# Altium PCB Robonaut.PcbDoc
Units mil, origin at the board's own origin, x right, y up, seen from the top; angles counter-clockwise.
Board outline 4928.03 x 4243.03 mil, 2 copper layers (Top Layer, Bottom Layer); 71 components, 81 nets, 356 pads, 9 vias.
Unrouted connection lines stored in the file: 1.
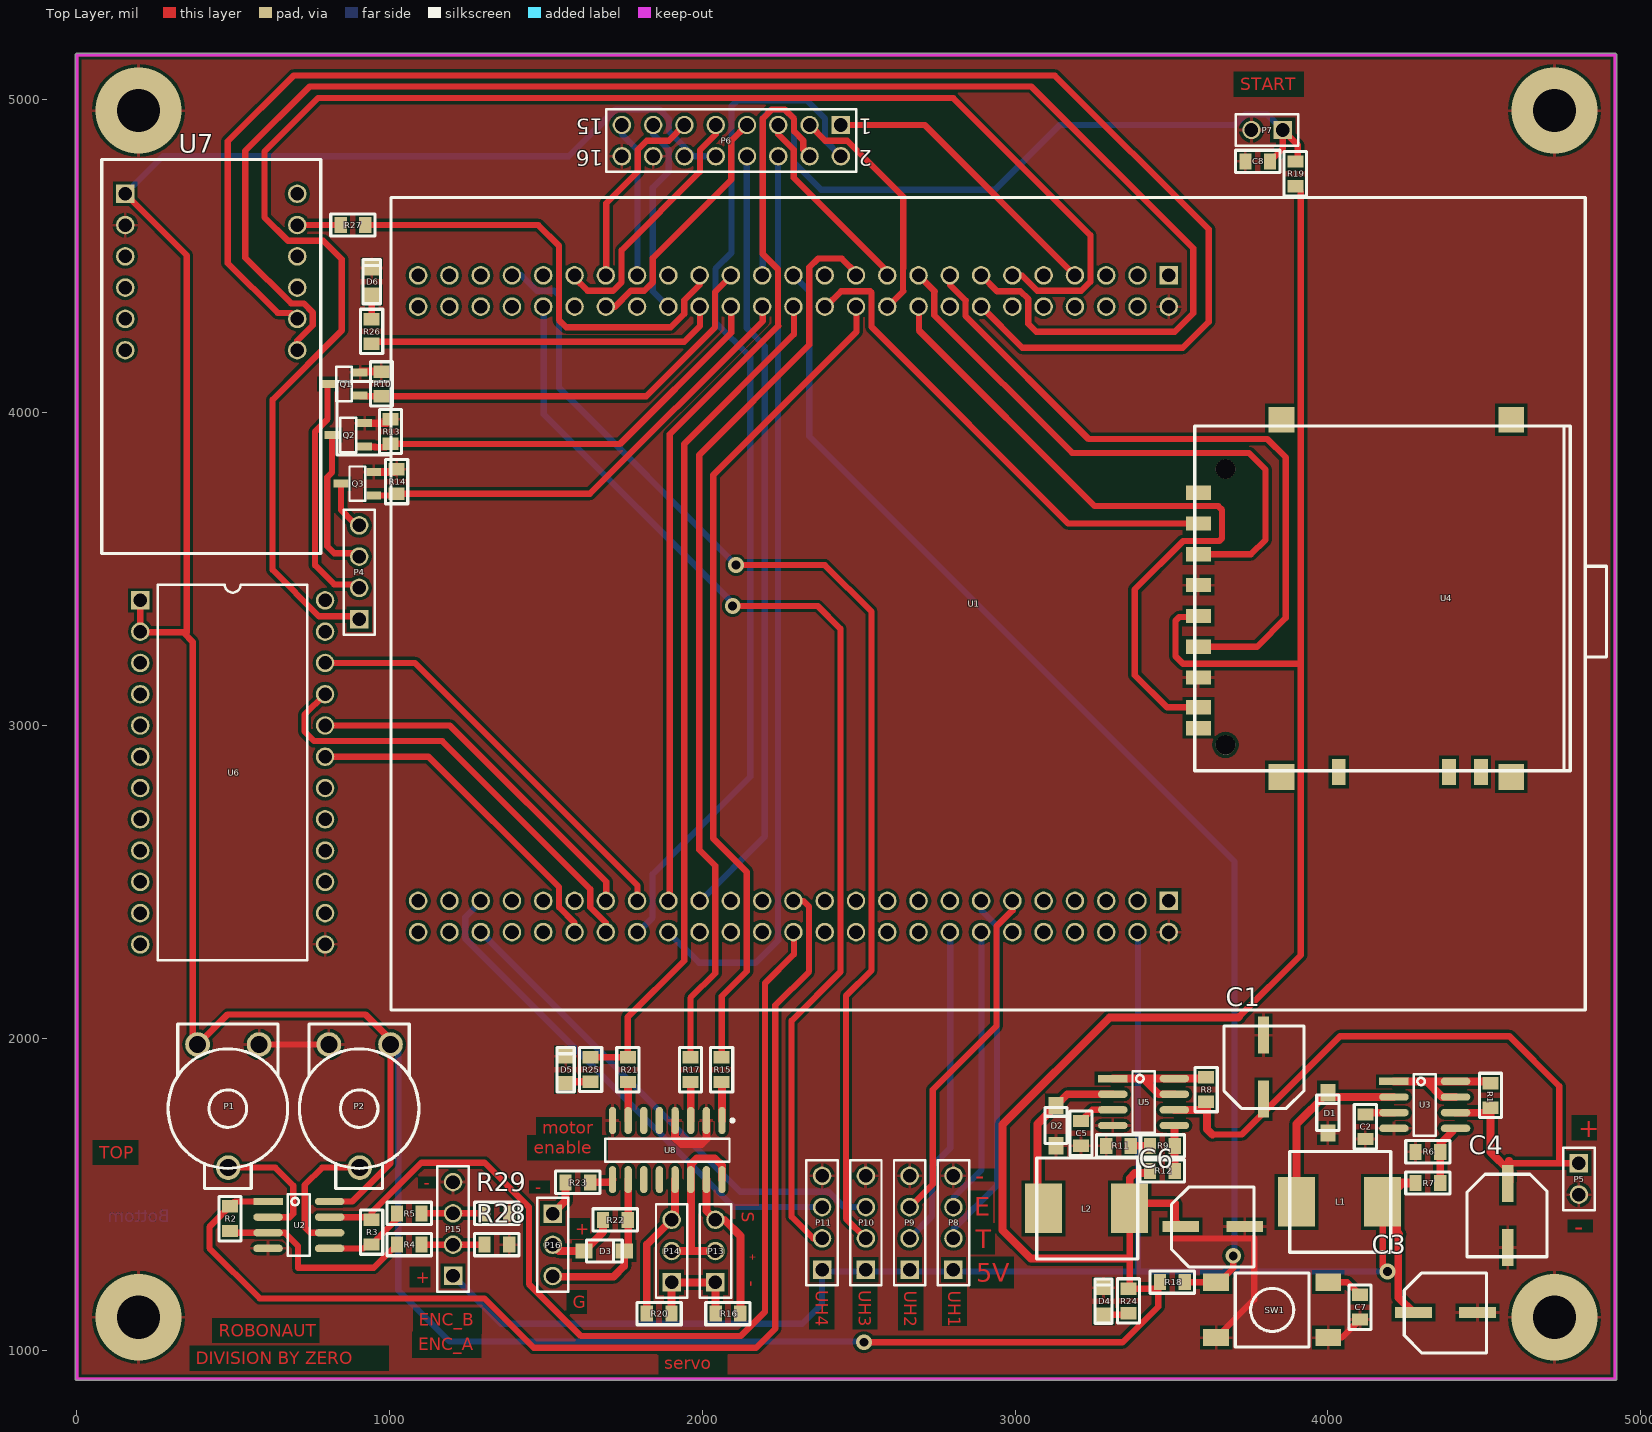
[diagram p0: Top Layer view]
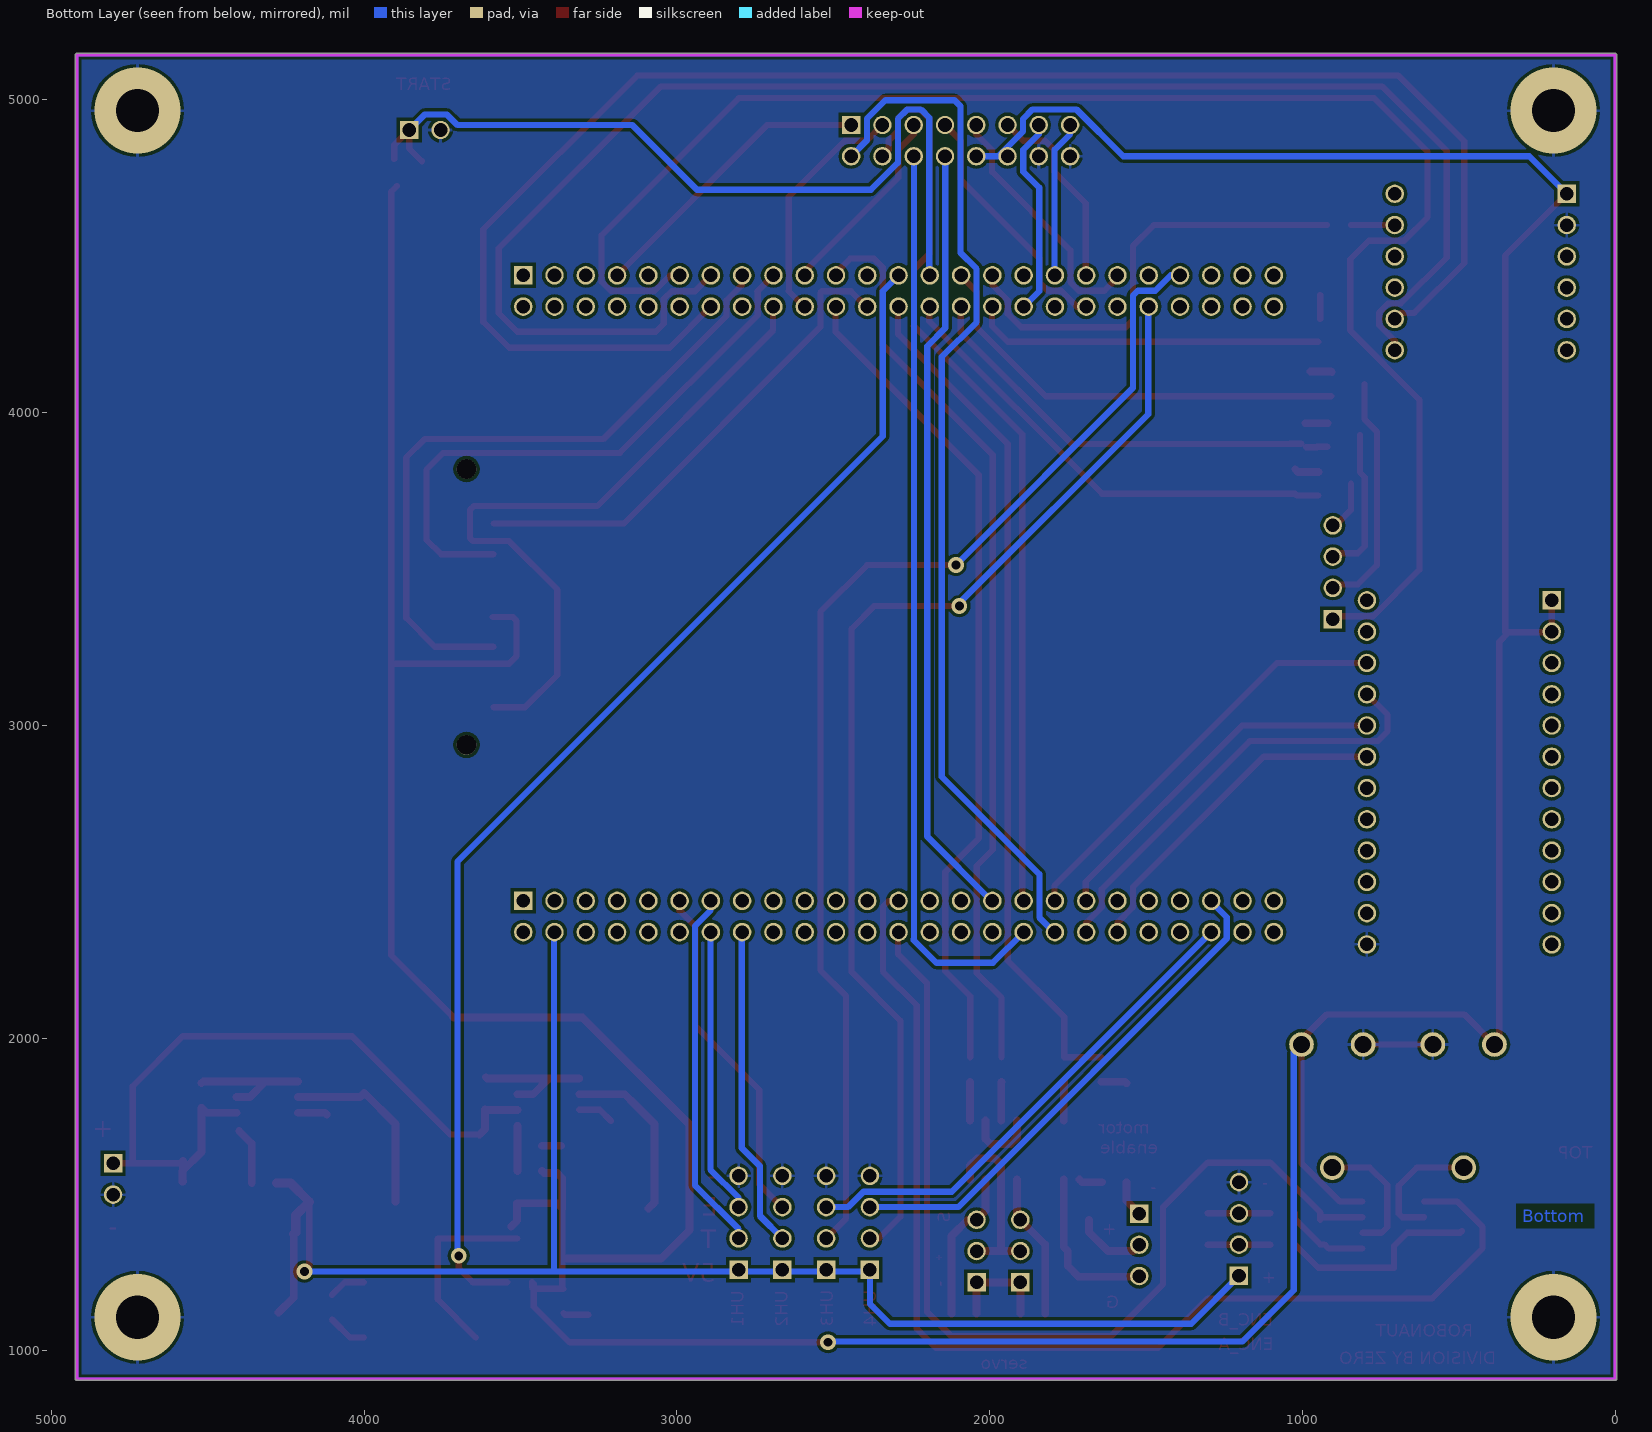
[diagram p1: Bottom Layer view, seen from below]
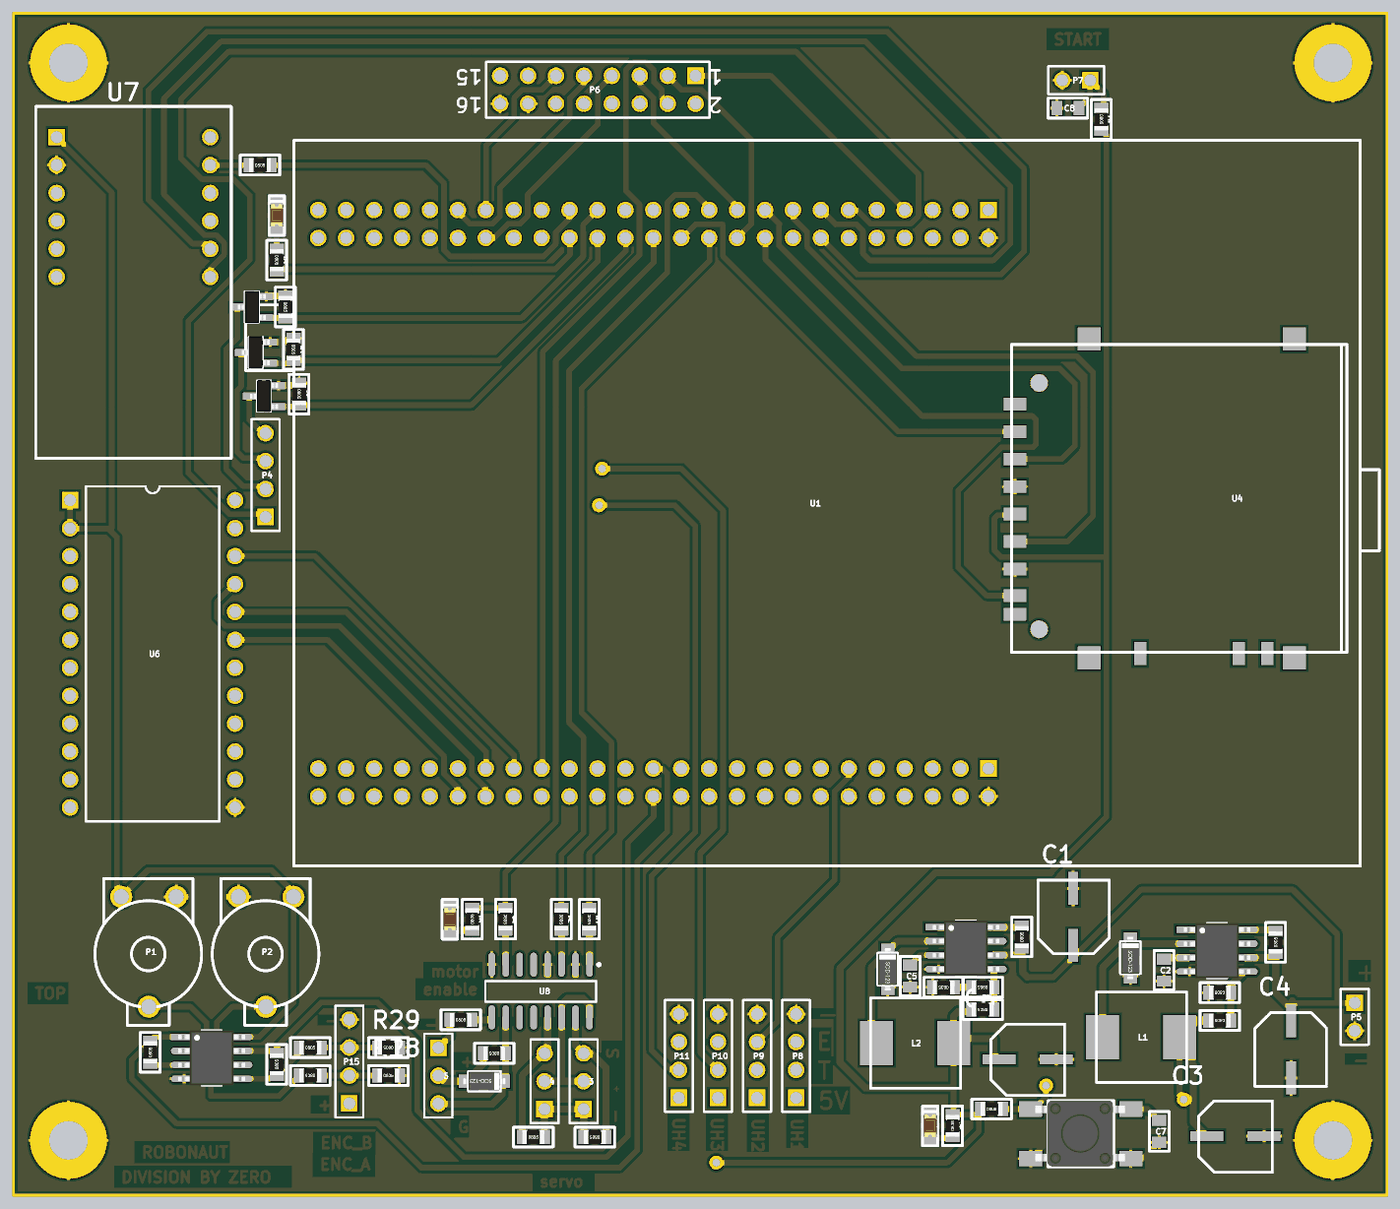
[diagram p2: 3D render of the assembled board from above, using the file's embedded part models]

## Layer stack, top to bottom
Top Layer: signal copper 1.4
Dielectric: dielectric 12.6, FR-4, Dk 4.8
Bottom Layer: signal copper 1.4

## Board outline
-5.01,911 ccw(c0,911) 0,905.99 4918,905.99 ccw(c4918,911) 4923.01,911 4923.01,5144 ccw(c4918,5144) 4918,5149.02 0,5149.02 ccw(c0,5144) -5.01,5144

## Design rules (kind name [scope] priority, off if disabled: settings)
Clearance [All] p1: gap=10
PolygonConnect [All] p1: connectstyle=Relief reliefconductorwidth=10 reliefentries=4 polygonreliefangle="90 Angle"
RoutingVias [All] p1: holewidth=28 width=50 viastyle="Through Hole" minholewidth=28 minwidth=50 maxholewidth=28 maxwidth=50
SilkscreenOverComponentPads [All] p1: minsilkscreentomaskgap=10
SolderMaskExpansion [All] p1: expansion=4
Width [All] p1: maxlimit=30 minlimit=20 preferedwidth=25
27 further rules are at their usual default settings.

## Components (designator, comment, footprint, x,y, rotation, side; value= is the part's Value field where it differs from the comment)
C1 "100uF" FP_CAP_ELKO_6,3X6,3 3794,1823 r90 top
C2 "470pF" FP_0805_CAP_085 4119.47,1717 r90 top
C3 "100uF" FP_CAP_ELKO_6,3X6,3 4291,1123 r0 top
C4 "100uF" FP_CAP_ELKO_6,3X6,3 4575,1518 r270 top
C5 "470pF" FP_0805_CAP_085 3210.47,1696 r90 top
C6 "100uF" FP_CAP_ELKO_6,3X6,3 3547,1398 r0 top
C7 "10nF" FP_0805_CAP_085 4102.47,1140 r270 top
C8 "10nF" FP_0805_CAP_085 3775.47,4804 r0 top
D1 "1N5819" FP_SOD-123 3999.47,1697 r90 top
D2 "1N5819" FP_SOD-123 3130.47,1656 r90 top
D3 "ZENER" FP_SOD-123 1621.47,1319.49 r0 top
D4 "LED" FP_0805_LED_RED 3282.47,1120 r90 top
D5 "LED" FP_0805_LED_RED 1562.47,1860 r90 top
D6 "LED" FP_0805_LED_RED 942.47,4380 r90 top
L1 "220uH" FP_IND_MURATA3131 3899.47,1477 r270 top
L2 "220uH" FP_IND_MURATA3131 3090.47,1456 r270 top
P1 "10k" "Res Trimmer TH" 582.47,1980 r180 top
P2 "10k" "Res Trimmer TH" 1002.47,1980 r180 top
P4 "Header 4" HDR1X4 902.47,3340 r90 top
P5 "Header 2" HDR1X2 4802.47,1600 r270 top
P6 "Header 8X2" HDR2X8 2442.47,4920 r180 top
P7 "Header 2" HDR1X2 3855.47,4904 r180 top
P8 "Header 4" HDR1X4 2802.47,1260 r90 top
P9 "Header 4" HDR1X4 2662.47,1260 r90 top
P10 "Header 4" HDR1X4 2522.47,1260 r90 top
P11 "Header 4" HDR1X4 2382.47,1260 r90 top
P13 "Header 3" HDR1X3 2041.47,1219.49 r90 top
P14 "Header 3" HDR1X3 1901.47,1219.49 r90 top
P15 "Header 4" HDR1X4 1202.47,1240 r90 top
P16 "Header 3" HDR1X3 1521.47,1439.49 r270 top
Q1 "MMBF170" BBMF170 853.47,4092 r0 top
Q2 "MMBF170" BBMF170 867.47,3929 r0 top
Q3 "MMBF170" BBMF170 896.47,3773 r0 top
R1 "0.33R" FP_0805_RES 4519.47,1817 r90 top
R2 "1M" FP_0805_RES 489.47,1423 r90 top
R3 "1M" FP_0805_RES 942.47,1380 r90 top
R4 "20k" FP_0805_RES 1062.47,1340 r180 top
R5 "20k" FP_0805_RES 1062.47,1440 r0 top
R6 "1K" FP_0805_RES 4319.47,1637 r180 top
R7 "3K" FP_0805_RES 4319.47,1537 r180 top
R8 "0.33R" FP_0805_RES 3610.47,1836 r90 top
R9 "2k4" FP_0805_RES 3470.47,1656 r180 top
R10 "10k" FP_0805_RES 973.47,4092 r270 top
R11 "47R" FP_0805_RES 3330.47,1656 r180 top
R12 "4k02" FP_0805_RES 3470.47,1576 r180 top
R13 "10k" FP_0805_RES 1002.47,3940 r270 top
R14 "10k" FP_0805_RES 1022.47,3780 r270 top
R15 "1k" FP_0805_RES 2061.47,1899.49 r270 top
R16 "10k" FP_0805_RES 2081.47,1119.49 r180 top
R17 "1k" FP_0805_RES 1961.47,1899.49 r270 top
R18 "10k" FP_0805_RES 3502.47,1220 r0 top
R19 "10k" FP_0805_RES 3895.47,4764 r270 top
R20 "10k" FP_0805_RES 1861.47,1119.49 r0 top
R21 "1k" FP_0805_RES 1761.47,1899.49 r270 top
R22 "10k" FP_0805_RES 1721.47,1419.49 r180 top
R23 "1k" FP_0805_RES 1601.47,1539.49 r0 top
R24 "1k" FP_0805_RES 3362.47,1160 r90 top
R25 "1k" FP_0805_RES 1642.47,1900 r90 top
R26 "1k" FP_0805_RES 942.47,4260 r270 top
R27 "10k" FP_0805_RES 882.47,4600 r0 top
R28 "xR" FP_0805_RES 1342.47,1340 r0 top
R29 "xR" FP_0805_RES 1342.47,1440 r180 top
SW1 "SW1" FP_TACTBTN 3642.47,1220 r90 top
U1 "STM32_F4_KIT" FP_STM32F4DISC 3491,4439.3 r270 top
U2 "LM358" FP_SO8_MS012AA 709.47,1403 r0 top
U3 "MC34063A" FP_SO8_MS012AA 4309.47,1787 r0 top
U4 "SecureDigital memory card" FP_CONN_SD 3672.47,2938 r90 top
U5 "MC34063A" FP_SO8_MS012AA 3410.47,1796 r0 top
U6 "STEVAL-MKI107V2" "STEVAL-MKI107V2 DIL24 Adapter" 202.47,3400 r0 top
U7 "STM BT MODULKÁRTYA" "STM BT MODUL" 322.47,4020 r270 top
U8 "TLP281-4" TLP281-4 1861.47,1639.49 r0 top

## Footprints (in the part's own frame and the unit in brackets; to place one, negate y for a bottom-side part, rotate by r counter-clockwise, add the part's x,y. Pads: shape width x height; smd on the part's side, far side on the other; paste and mask are expansions set on the pad)
BBMF170 [mm] "SOT23-3 tok"
  rect 1.2x0.65 smd: D(-1.327,0) G(1.327,-0.95) S(1.327,0.95)
  silkscreen extent -0.64,-1.4 0.64,1.4, body extent -1.27,-1.46 1.27,1.46, height 0.97
FP_0805_CAP_085 [mm] "0805 kapacitás YAGEO 0.85mm magas"
  rect 1x1.3 smd: 1(-1,0) 2(1,0)
  silkscreen extent -1.8,-0.9 1.8,0.9, body extent -1,-0.64 1.03,0.64, height 0.85
FP_0805_LED_RED [mm] "0805 méretû piros LED"
  rect 1.2x1.3 smd: A(-0.1,0) K(2.1,0)
  silkscreen extent -0.8,-0.7 2.8,0.7, body extent 0.01,-0.63 2.03,0.62, height 1.1
FP_0805_RES [mm] "0805 ellenállás"
  rect 1x1.3 smd: 1(-1,0) 2(1,0)
  silkscreen extent -1.8,-0.9 1.8,0.9, body extent -1,-0.62 1,0.63, height 0.62
FP_CAP_ELKO_6,3X6,3 [mm] "680 uF/SMD-NIC 47 uF/SMD-NIC ELKO 16 V 105°C 20 % KIS IMPEDANCIÁS SMD O6,3x6,3mm"
  rect 3x0.9 smd: N(4.75,0) P(-0.45,0)
  silkscreen extent -1.2,-3.3 5.5,3.2, body extent -1.25,-3.3 5.35,3.3, height 6.3
FP_CONN_SD [mm]
  rect 2.1x2.1 smd: 0(-2.6,-4.55) 0(-2.6,-23.2) 0(26.4,-23.2) 0(26.4,-4.55)
  round 1.6 hole 1.6: 0(0,0) 0(22.4,0)
  rect 1.15x2.05 smd: 1(17.975,2.2) 2(15.475,2.2) 3(12.975,2.2) 4(10.475,2.2) 5(7.975,2.2) 6(5.475,2.2) 7(3.05,2.2) 8(1.35,2.2) 9(20.475,2.2)
  rect 2.1x1.1 smd: 10(-2.2,-9.2) 11(-2.2,-18.15) 12(-2.2,-20.75)
  silkscreen extent -2.1,-28 25.9,2.5, body extent -2.1,-39 25.9,2.5, height 2.9
FP_IND_MURATA3131 [mm] "Murata Chip Inductor LQH88P Series (3131 Size)"
  rect 4x3 smd: 1(0,0) 2(0,7)
  silkscreen extent -4.1,-0.55 4.1,7.65, body extent -4,-0.55 4,7.65, height 3.8
FP_SO8_MS012AA [mm] "SO8 JEDEC MS-012AA, Analog Devices R-8, SO8-SOT96-1, NS M08A"
  rect 2.4x0.6 smd: 1(-2.5,1.905)
  oval 2.4x0.6 smd: 2(-2.5,0.635) 3(-2.5,-0.635) 4(-2.5,-1.905) 5(2.5,-1.905) 6(2.5,-0.635) 7(2.5,0.635) 8(2.5,1.905)
  silkscreen extent -0.9,-2.5 0.9,2.5, body extent -3.03,-2.5 3.03,2.5, height 1.9
FP_SOD-123 [mm]
  rect 1.41x1.22 smd: 1(3.27,0) 2(0,0)
  silkscreen extent 0.2,-0.9 3.1,0.9, body extent -0.3,-0.85 3.55,0.85, height 1.47
FP_STM32F4DISC [mm] "STM32 F4 Discovery evaluation board"
  rect 1.5x1.5 hole 1.1: 1(0,0) 51(50.8,0)
  round 1.5 hole 1.1: 2(2.54,0) 3(0,-2.54) 4(2.54,-2.54) 5(0,-5.08) 6(2.54,-5.08) 7(0,-7.62) 8(2.54,-7.62) 9(0,-10.16) 10(2.54,-10.16) 11(0,-12.7) 12(2.54,-12.7) 13(0,-15.24) 14(2.54,-15.24) 15(0,-17.78) 16(2.54,-17.78) 17(0,-20.32) 18(2.54,-20.32) 19(0,-22.86) 20(2.54,-22.86) 21(0,-25.4) 22(2.54,-25.4) 23(0,-27.94) 24(2.54,-27.94) 25(0,-30.48) 26(2.54,-30.48) 27(0,-33.02) 28(2.54,-33.02) 29(0,-35.56) 30(2.54,-35.56) 31(0,-38.1) 32(2.54,-38.1) 33(0,-40.64) 34(2.54,-40.64) 35(0,-43.18) 36(2.54,-43.18) 37(0,-45.72) 38(2.54,-45.72) 39(0,-48.26) 40(2.54,-48.26) 41(0,-50.8) 42(2.54,-50.8) 43(0,-53.34) 44(2.54,-53.34) 45(0,-55.88) 46(2.54,-55.88) 47(0,-58.42) 48(2.54,-58.42) 49(0,-60.96) 50(2.54,-60.96) 52(53.34,0) 53(50.8,-2.54) 54(53.34,-2.54) 55(50.8,-5.08) 56(53.34,-5.08) 57(50.8,-7.62) 58(53.34,-7.62) 59(50.8,-10.16) 60(53.34,-10.16) 61(50.8,-12.7) 62(53.34,-12.7) 63(50.8,-15.24) 64(53.34,-15.24) 65(50.8,-17.78) 66(53.34,-17.78) 67(50.8,-20.32) 68(53.34,-20.32) 69(50.8,-22.86) 70(53.34,-22.86) 71(50.8,-25.4) 72(53.34,-25.4) 73(50.8,-27.94) 74(53.34,-27.94) 75(50.8,-30.48) 76(53.34,-30.48) 77(50.8,-33.02) 78(53.34,-33.02) 79(50.8,-35.56) 80(53.34,-35.56) 81(50.8,-38.1) 82(53.34,-38.1) 83(50.8,-40.64) 84(53.34,-40.64) 85(50.8,-43.18) 86(53.34,-43.18) 87(50.8,-45.72) 88(53.34,-45.72) 89(50.8,-48.26) 90(53.34,-48.26) 91(50.8,-50.8) 92(53.34,-50.8) 93(50.8,-53.34) 94(53.34,-53.34) 95(50.8,-55.88) 96(53.34,-55.88) 97(50.8,-58.42) 98(53.34,-58.42) 99(50.8,-60.96) 100(53.34,-60.96)
  silkscreen extent -6.33,-67.56 59.67,35.56, body extent -6.33,-67.69 59.67,35.56, height 24.6
FP_TACTBTN [mm] "TE CONNECTIVITY / ALCOSWITCH - FSM2JSMA"
  rect 1.4x2.1 smd: 1(0,0) 2(0,-9.1) 3(-4.5,0) 4(-4.5,-9.1)
  silkscreen extent -5.25,-7.55 0.75,-1.55, body extent -5.23,-8.57 0.77,-0.42, height 5
HDR1X2 [mm] "Connector; Header; 2 Position"
  rect 1.5x1.5 hole 1.1: 1(0,0)
  round 1.5 hole 1.1: 2(2.54,0)
  silkscreen extent -1.27,-1.27 3.81,1.27
HDR1X3 [mm] "Connector; Header; 3 Position"
  rect 1.5x1.5 hole 1.1: 1(0,0)
  round 1.5 hole 1.1: 2(2.54,0) 3(5.08,0)
  silkscreen extent -1.27,-1.27 6.35,1.27
HDR1X4 [mm] "Connector; Header; 4 Position"
  rect 1.5x1.5 hole 1.1: 1(0,0)
  round 1.5 hole 1.1: 2(2.54,0) 3(5.08,0) 4(7.62,0)
  silkscreen extent -1.27,-1.27 8.89,1.27
HDR2X8 [mm] "Connector; Header; 8x2 Position"
  rect 1.5x1.5 hole 1.1: 1(0,0)
  round 1.5 hole 1.1: 2(0,2.54) 3(2.54,0) 4(2.54,2.54) 5(5.08,0) 6(5.08,2.54) 7(7.62,0) 8(7.62,2.54) 9(10.16,0) 10(10.16,2.54) 11(12.7,0) 12(12.7,2.54) 13(15.24,0) 14(15.24,2.54) 15(17.78,0) 16(17.78,2.54)
  silkscreen extent -1.27,-1.27 19.05,3.81
"Res Trimmer TH" [mm]
  round 2 hole 1.4: 1(0,0) 2(2.5,10) 3(5,0)
  silkscreen extent -2.31,-1.65 7.39,11.68
"STEVAL-MKI107V2 DIL24 Adapter" [mm]
  rect 1.5x1.5 hole 1.1: 1(0,0)
  round 1.5 hole 1.1: 2(0,-2.54) 3(0,-5.08) 4(0,-7.62) 5(0,-10.16) 6(0,-12.7) 7(0,-15.24) 8(0,-17.78) 9(0,-20.32) 10(0,-22.86) 11(0,-25.4) 12(0,-27.94) 13(15.01,-27.94) 14(15.01,-25.4) 15(15.01,-22.86) 16(15.01,-20.32) 17(15.01,-17.78) 18(15.01,-15.24) 19(15.01,-12.7) 20(15.01,-10.16) 21(15.01,-7.62) 22(15.01,-5.08) 23(15.01,-2.54) 24(15.01,0)
  silkscreen extent 1.43,-29.21 13.58,1.27
"STM BT MODUL" [mm]
  rect 1.5x1.5 hole 1.1: 1(-17.272,-4.268)
  round 1.5 hole 1.1: 2(-14.732,-4.268) 3(-12.192,-4.268) 4(-9.652,-4.268) 5(-7.112,-4.268) 6(-4.572,-4.268) 7(-4.572,9.702) 8(-7.112,9.702) 9(-9.652,9.702) 10(-12.192,9.702) 11(-14.732,9.702) 12(-17.272,9.702)
  silkscreen extent -20.07,-6.17 11.94,11.61, body extent -18.54,-5.54 -3.3,10.97, height 2.54
TLP281-4 [mm]
  oval 0.6x2.2 smd: 1(5.105,2.476) 2(3.835,2.476) 3(2.565,2.476) 4(1.295,2.476) 5(0.025,2.476) 6(-1.245,2.476) 7(-2.515,2.476) 8(-3.785,2.476) 9(-3.785,-2.324) 10(-2.515,-2.324) 11(-1.245,-2.324) 12(0.025,-2.324) 13(1.295,-2.324) 14(2.565,-2.324) 15(3.835,-2.324) 16(5.105,-2.324)
  silkscreen extent -4.37,-0.89 6.08,2.6

## Part data
C1 C3 C4 C6: library part CAP_ELECT, "Polarized Capacitor"
C2 C5 C7 C8: library part CAP, "Capacitor"
D1 D2: library part DIODE
D3: "Zener Diode"
D4 D5 D6: "Typical RED GaAs LED"
L1 L2: library part IND, "Inductor"
P1 P2: library part POTI
P4 P8 P9 P10 P11 P15: "Header, 4-Pin"
P5 P7: "Header, 2-Pin"
P6: "Header, 8-Pin, Dual row"
P13 P14 P16: "Header, 3-Pin"
Q1 Q2 Q3: "N fet  60V 500mA"
R1 R2 R3 R4 R5 R6 R7 R8 R9 R10 R11 R12 R13 R14 R15 R16 R17 R18 R19 R20 R21 R22 R23 R24 R25 R26 R27 R28 R29: library part RES, "Resistor"
U1: library part STM32F4DISCOVERY, "STM32 F4 Discovery Evaluation Kit"
U2: "Low power dual operational amplifiers"
U4: library part "SD card"
U6: "Three-axis digital output gyroscope"
U7: "bluetooth modulkártya"
U8: "Optocsatoló 4X"

## Via types
v1: diameter 50, hole 28, Top Layer to Bottom Layer, 5 vias
v2: diameter 275.59, hole 137.8, Top Layer to Bottom Layer, 4 vias

## Nets (pads, with @x,y where several pads share a name; then routed paths per layer and width w, separated by ;. In a path a pad name is that pad's centre, name@x,y a point inside that pad or via, vN(x,y) a via of type N, cw(c..) or ccw(c..) an arc to the next point about the centre after c; other vN are vias at no path point)
3V3: C6.P L2.2 P1.3 P2.1 P6.10 P6.12 R12.2 R18.1 R19.2 R24.2 U2.8 U4.4 U6.1 U6.2 U7.1 | length 15781.4
  Top Layer w20: U7.1 351.47,4502.97 351.47,3298 204.47,3298 U6.2 U6.1 ; 339.47,3298 370.47,3267 370.47,1995.15 P1.3 481.47,2075.85 922.62,2075.85 1002.47,1996 P2.1 1002.47,1600.47 880,1478 U2.8 ; v1(2516.47,1028) 3343.4,1028 3457,1141.6 3457,1213.9 R18.1 3463.1,1203.1 3459.37,1199.37 R24.2 3366.06,1202.96 L2.2 ; U4.4@3589.43,3346.83 3524.3,3346.83 3512.47,3335 3512.47,3221 3536.47,3197 3901.7,3197 ; 3715.55,2068.55 3912.94,2265.94 3912.94,3224 ; R19.2 3912.94,4707.16 3912.94,3224 ; 3912.94,3207.47 3912.94,3224
  Top Layer w25: 3360.06,1296 3049.47,1296 2959.47,1386 2959.47,1724 3301.47,2066 3713,2066 3715.55,2068.55 ; R12.2 3424.1,1569 3382.47,1569 3366.06,1552.59 L2.2 3382.17,1472.1 3510.47,1472.1 3510.47,1416.81 C6.P
  Bottom Layer w20: U7.1 274.44,4820 1572.43,4820 1721.96,4969.53 1862.99,4969.53 1892.94,4939.57 1892.94,4899.48 1972.43,4820 P6.12 P6.10 ; P2.1 1027.47,1955 1027.47,1194 1191.47,1030 2514.47,1030 v1(2516.47,1028)
5V: C3.P L1.2 P8.1 P9.1 P10.1 P11.1 P15.1 R7.2 U1.54 | length 5026.3
  Top Layer w20: L1.2 4175.06,1269.41 v1(4190.47,1254)
  Top Layer w25: 4225,1373 4225,1171.28 C3.P
  Top Layer w30: 4225,1373 4218.96,1379.04 4218.96,1433.1 L1.2 4235.06,1537 R7.2
  Bottom Layer w20: P15.1 1355.47,1087 2318.47,1087 2382.47,1151 P11.1 2388.47,1254 v1(4190.47,1254) ; 3392.47,1255 U1.54@3392.47,2338
AD1: P6.1 U1.7 | length 949.7
  Top Layer w20: P6.1 2710.47,4920 U1.7@3192.47,4438
AD2: P6.3 U1.20 | length 768.1
  Top Layer w20: P6.3 2392.94,4869.53 2462.99,4869.53 2642,4690.52 2642,4460.87 2641.47,4460.34 2641.47,4389 2642,4388.47 2592.47,4338.94 U1.20@2592.47,4338
AD3: P6.5 U1.19 | length 627
  Top Layer w20: P6.5 2242.47,4890.04 2292,4840.52 2292,4750.94 2592.47,4450.47 U1.19@2592.47,4438
"AD4 IR": P4.1 U1.11 | length 5262.2
  Top Layer w20: P4.1 892.94,3349.53 773.85,3349.53 625.47,3497.9 625.47,4042 846.47,4263 846.47,4491 787.94,4549.53 674.94,4549.53 599.47,4625 599.47,4835 770.47,5006 2802.47,5006 3240.53,4567.94 3240.53,4418.78 3211.51,4389.77 3070.49,4389.77 3041.47,4418.78 3041.47,4418.96 3022.43,4438 U1.11@2992.47,4438
AKKU+: D3.2 P16.2 R22.2 | length 233.4
  Top Layer w25: P16.2 1541.47,1319.49 D3.2 1682.1,1380.12 R22.2
AKKU-: P16.1 R23.1 | length 116.8
  Top Layer w25: P16.1 1562.1,1480.12 R23.1
BT_RES: R27.2 U1.31 | length 1455.4
  Top Layer w20: R27.2 1475.47,4600 1541.3,4534.17 1541.3,4296.17 1564.47,4273 1898.47,4273 1941.47,4316 1941.47,4359.81 1992.47,4410.81 U1.31@1992.47,4438
BUTTON: R18.2 SW1.1 U1.25 | length 3942.8
  Top Layer w20: R18.2 SW1.1 3653,1220 3697.47,1264.47 v1(3697.47,1304)
  Bottom Layer w20: U1.25 2341.47,4388.83 2341.47,3924.53 3701.47,2564.53 3701.47,1300 v1(3697.47,1304)
ECHO1: P8.3 U1.64 | length 915.3
  Bottom Layer w20: P8.3 2802.47,1489.96 2892.47,1579.96 U1.64@2892.47,2338
ECHO2: P9.3 U1.61 | length 1086.4
  Top Layer w20: P9.3 2736,1533.53 2736,1835 2940.53,2039.53 2940.53,2358.87 2989.7,2408.04 2992.47,2408.04
ECHO3: P10.3 U1.96 | length 1593.7
  Bottom Layer w20: U1.96@1292.47,2338 2120.94,1509.53 2402.99,1509.53 2452.51,1460 P10.3
ECHO4: P11.3 U1.95 | length 1637.1
  Bottom Layer w20: U1.95@1292.47,2438 1241.47,2387 1241.47,2318.78 2100.26,1460 P11.3
ENC_A: P15.2 R4.1 R28.1 | length 201.3
  Top Layer w20: R4.1 P15.2 R28.1
ENC_B: P15.3 R5.2 R29.2 | length 201.3
  Top Layer w20: R5.2 P15.3 R29.2
ENCODER_A: R2.2 U1.75 U2.1 | length 3705.3
  Top Layer w20: U2.1 505.1,1478 R2.2 423.47,1396.37 423.47,1329 584.47,1168 1302.35,1168 1460.35,1010 2171.47,1010 2233,1071.53 2233,2105.1 2340.9,2213 2340.9,2420.57 2323.47,2438 U1.75@2292.47,2438
ENCODER_B: R3.2 U1.76 U2.7 | length 3141.9
  Top Layer w20: U2.7 933.84,1428 R3.2 942.47,1443 1101.47,1602 1303.47,1602 1445.47,1460 1445.47,1214 1611.47,1048 2122.91,1048 2200,1125.09 2200,2175.53 2292.47,2268 U1.76@2292.47,2338
GND: C1.N C2.1 C3.N C4.N C5.1 C6.N C7.2 C8.1 D1.2 D2.2 D4.K D5.K D6.K P1.1 P2.3 P5.2 P6.14 P6.16 P7.2 P8.4 P9.4 P10.4 P11.4 P15.4 Q1.S Q2.S Q3.S R6.2 R10.1 R11.2 R13.1 R14.1 R28.2 R29.1 SW1.3 SW1.4 U1.2 U1.52 U2.4 U3.4 U4.3 U4.6 U5.4 U6.13 U7.2 U8.2 U8.4 U8.8 | length 1415.7
  Top Layer w20: P1.1 P2.3 ; 3510.47,1359.9 3764.57,1359.9 3764.57,1164.94 SW1.3 ; SW1.4 4044.68,1042.83 C7.2
  Top Layer w25: Q1.S 907.68,4131.37 R10.1 ; Q2.S R13.1@989.5,3966.4 ; Q3.S 1013.5,3810.4 R14.1 ; U8.4 1912.47,1682.49 1933.47,1661.49 1996.47,1661.49 2012.47,1677.49 U8.2
  other v2: 196.85,1107.85 4724.41,1107.85 196.85,4966.12 4724.41,4966.12
GYRO_CS: U1.90 U6.19 | length 1084.7
  Top Layer w20: U6.19 1124,2900 1541.47,2482.53 1541.47,2418.78 1591,2369.26 U1.90
GYRO_MISO: U1.88 U6.21 | length 1427.3
  Top Layer w20: U6.21 727.47,3034.06 727.47,2981 758.47,2950 1168.42,2950 1641.47,2476.94 1641.47,2418.78 1691,2369.26 U1.88
GYRO_MOSI: U1.85 U6.22 | length 1344
  Top Layer w20: U6.22 1080.47,3200 1792.47,2488 U1.85@1792.47,2438
GYRO_SCK: U1.87 U6.20 | length 1168.2
  Top Layer w20: U6.20 1192.47,3000 1692.47,2500 U1.87@1692.47,2438
IO1: Q1.G R10.2 U1.29 | length 1411
  Top Layer w20: Q1.G@907.69,4052.63 R10.2 1820.1,4052.63 2040.53,4273.06 2040.53,4359.81 2040,4360.34 2040,4385.53 U1.29@2092.47,4438
IO2: Q2.G R13.2 U1.30 | length 1392.2
  Top Layer w20: Q2.G 953.47,3891.6 951.5,3889.63 R13.2@987.47,3889.63 ; R13.2 1038.47,3900.63 1039.1,3900 1736.47,3900 2092.47,4256 U1.30@2092.47,4338
IO3: Q3.G R14.2 U1.28 | length 1519.6
  Top Layer w20: Q3.G 1017.44,3735.6 R14.2 1640.1,3740.63 2192.47,4293 U1.28@2192.47,4338
KORM_PWM: P14.3 R20.1 U8.13 | length 465.9
  Top Layer w25: R20.1 1822.1,1340.12 P14.3 1912.47,1430.49 U8.13
KORMANY_PWM: R17.1 U1.21 | length 2917.1
  Top Layer w20: R17.1 1961.47,2128.77 2040.8,2208.1 2040.8,2551.2 1989.47,2602.53 1989.47,3864.96 2341.47,4216.96 2341.47,4465 2369.47,4493 2445.47,4493 2492.47,4446 U1.21@2492.47,4437.06
LED: R26.2 U1.32 | length 1124.8
  Top Layer w20: R26.2@948.84,4227 1941.47,4227 1992.47,4278 U1.32@1992.47,4338
MOT_ENABLE: D3.1 P16.3 R22.1 U8.10 | length 524.8
  Top Layer w25: P16.3 1523.47,1237.49 1715.47,1237.49 1750.21,1272.23 D3.1 1762.47,1331.75 U8.10
MOT_PWM: P13.3 R16.1 U8.15 | length 490.3
  Top Layer w25: U8.15 2012.47,1448.49 P13.3 2069.47,1419.49 2121.47,1367.49 2121.47,1120.12 R16.1
MOTOR_ENABLE: R21.1 R25.2 U1.26 | length 2750.2
  Top Layer w20: R25.2 R21.1@1760.96,1939.37 ; R21.1 1761.47,2068 1941.47,2248 1941.47,2311.3 ; 1941.47,2298.63 1941.47,3900 2292.47,4251 U1.26@2292.47,4338
MOTOR_PWM: R15.1 U1.22 | length 2666.2
  Top Layer w20: R15.1 2061.47,2134.07 2141.4,2214 2141.4,2531.6 2034.47,2638.53 2034.47,3801 2492.47,4259 U1.22@2492.47,4338
MUX1: P6.2 U1.86 | length 3331.7
  Bottom Layer w20: U1.86@1792.47,2338 1840.53,2386.06 1840.53,2524.06 2152.47,2836 2152.47,4178.77 2041.47,4289.77 2041.47,4459.81 2092.94,4511.29 2092.94,4980.47 2112,4999.53 2332.99,4999.53 2392,4940.52 2392,4870.47 P6.2
MUX2: P6.4 U1.83 | length 2932.1
  Top Layer w20: U1.83@1892.47,2438 1895.47,2441 1895.47,3931 2242,4277.53 2241.47,4278.06 2241.47,4459.04 2192.94,4507.57 2192.94,4940.52 2221.96,4969.53 2262.99,4969.53 2292.94,4939.57 2292.94,4899.48 2322,4870.43 2322,4840.47 P6.4
MUX3: P6.6 U1.84 | length 2929.6
  Bottom Layer w20: U1.84 1989.3,2241 2170,2241 2242.47,2313.47 2242.47,2316.78 2241.47,2317.78 2241.47,4819 P6.6
MUX4: P6.8 U1.81 | length 2484.4
  Bottom Layer w20: U1.81@1992.47,2438 2199.47,2645 2199.47,4205 ; P6.8 2141.47,4819 2141.47,4270.83 2199.47,4212.83
NetC2_2: C2.2 U3.3 | length 93.9
  Top Layer w25: C2.2 4125.1,1762 U3.3
NetC5_2: C5.2 U5.3 | length 116.3
  Top Layer w20: C5.2 3246.1,1771 U5.3
NetC7_1: C7.1 SW1.2 | length 118.6
  Top Layer w20: SW1.2 4061.84,1220 C7.1
NetD1_1: D1.1 L1.1 U3.2 | length 607.4
  Top Layer w25: L1.1 3899.47,1725.74 D1.1 4013.21,1812 U3.2
NetD2_1: D2.1 L2.1 U5.2 | length 557.6
  Top Layer w25: L2.1 3071.47,1475 3071.47,1725.74 D2.1 3166.73,1821 U5.2
NetD4_1: D4.A R24.1 | length 81.9
  Top Layer w20: D4.A 3357.91,1116.06 R24.1
NetD5_1: D5.A R25.1 | length 81.9
  Top Layer w25: D5.A 1567.04,1860.63 R25.1
NetD6_1: D6.A R26.1 | length 76.7
  Top Layer w20: R26.1 D6.A
NetP1_2: P1.2 U2.2 | length 406.1
  Top Layer w20: P1.2 634.17,1586.3 691.47,1529 691.47,1439 680.47,1428 U2.2
NetP2_2: P2.2 U2.6 | length 420.4
  Top Layer w20: U2.6 746.47,1378 728.47,1396 728.47,1531 783.77,1586.3 P2.2
NetP4_2: P4.2 Q1.D | length 742.7
  Top Layer w20: Q1.D 801.23,3979.7 761.47,3939.95 761.47,3512 822.47,3451 P4.2@882.47,3451
NetP4_3: P4.3 Q2.D | length 453.1
  Top Layer w20: Q2.D 815.23,3808.7 800.61,3794.08 800.61,3572.87 822.47,3551 P4.3@882.47,3551
NetP4_4: P4.4 Q3.D | length 137.8
  Top Layer w20: Q3.D 844.23,3689.24 P4.4@882.47,3651
NetR1_2: R1.2 U3.1 U3.7 U3.8 | length 424.9
  Top Layer w25: U3.1 4314.47,1862 ; U3.7 4364.47,1812 4314.47,1862 ; R1.2 4513.84,1862 U3.8 4314.47,1862
NetR2_1: R2.1 R4.2 U2.3 | length 654
  Top Layer w20: R2.1 495.1,1378 U2.3 664.47,1378 706.47,1336 706.47,1266 949.1,1266 R4.2
NetR3_1: R3.1 R5.1 U2.5 | length 272.6
  Top Layer w20: U2.5 916.47,1328 929.1,1340.63 R3.1 1023.1,1421.26 R5.1
NetR6_1: R6.1 R7.1 U3.5 | length 182.7
  Top Layer w25: R7.1 R6.1 4358.84,1662.94 U3.5@4398.95,1703.05
NetR8_2: R8.2 U5.1 U5.7 U5.8 | length 420.8
  Top Layer w25: U5.1 3409,1871 ; U5.7 3459,1821 3409,1871 ; R8.2 3606.1,1871 U5.8 3409,1871
NetR9_1: R9.1 R12.1 U5.5 | length 144.1
  Top Layer w25: R12.1 R9.1 U5.5@3509.84,1720.06
NetR9_2: R9.2 R11.1 | length 61.3
  Top Layer w25: R11.1 R9.2
NetR15_2: R15.2 U8.1 | length 123.6
  Top Layer w25: R15.2 2062.47,1859.12 U8.1
NetR17_2: R17.2 U8.3 | length 123.6
  Top Layer w25: R17.2 1962.47,1859.12 U8.3
NetR21_2: R21.2 U8.7 | length 123.6
  Top Layer w25: R21.2 1761.47,1827.49 1762.47,1826.49 U8.7
NetR23_2: R23.2 U8.9 | length 75.2
  Top Layer w25: R23.2 1703.96,1539.49 U8.9
NetR27_1: R27.1 U7.11 | length 118.7
  Top Layer w20: U7.11@724.44,4600 749.44,4600 R27.1
RX: U1.14 U7.8 | length 5222.3
  Top Layer w20: U7.8 685.44,4319 641.47,4319 482.47,4478 482.47,4868 692.47,5078 3127,5078 3618.47,4586.53 3618.47,4290.47 3536,4208 3022.47,4208 U1.14@2892.47,4338
SD_CS: U1.24 U4.1 | length 1586.7
  Top Layer w20: U1.24@2392.47,4338 2443.3,4388.83 2536.17,4388.83 2540.53,4384.47 2540.53,4274.47 3169.32,3645.68 U4.1
SD_MISO: U1.18 U4.7 | length 2238.8
  Top Layer w20: U1.18@2692.47,4338 2692.47,4263 3254.01,3701.46 3649.01,3701.46 3661.47,3689 3661.47,3599 3652.36,3589.89 3537.22,3589.89 3382.47,3435.14 3382.47,3161 3485.39,3058.08 U4.7
SD_MOSI: U1.17 U4.2 | length 1869.2
  Top Layer w20: U1.17@2692.47,4438 2742.94,4387.53 2741.47,4386.06 2741.47,4311.83 3181.91,3871.39 3747.09,3871.39 3800.47,3818 3800.47,3594 3753.72,3547.25 U4.2
SD_SCK: U1.15 U4.5 | length 2191.5
  Top Layer w20: U1.15@2792.47,4438 2792.47,4408.04 2842,4358.52 ; 2841.47,4358.52 2841.47,4309 3234.44,3916.03 3806.41,3916.03 3865.47,3856.97 3865.47,3344 3773.45,3251.98 U4.5
SHIFT_LE: P6.15 U1.35 | length 502
  Bottom Layer w20: P6.15 1742.47,4890.04 1792,4840.52 U1.35@1792,4438.47
SHIFT_MISO: P6.7 U1.38 | length 809.4
  Top Layer w20: U1.38@1692.47,4338 1719.66,4338 1771.43,4389.77 1814.29,4389.77 1841,4416.48 1841,4494.53 2092,4745.53 2092,4869.53 P6.7
SHIFT_MOSI: P6.9 U1.39 | length 812.6
  Top Layer w20: U1.39@1592.47,4438 1592.47,4430 1632.7,4389.77 1714.29,4389.77 1741.47,4416.96 1741.47,4519.94 1992,4770.47 1992,4839.57 2042.47,4890.04 P6.9
SHIFT_OE: P6.13 U1.34 | length 642.7
  Bottom Layer w20: P6.13 1842.47,4890.04 1892,4840.52 1892,4770.47 1841.47,4719.94 1841.47,4388.83 U1.34
SHIFT_SCK: P6.11 U1.37 | length 626.6
  Top Layer w20: U1.37@1692.47,4438 1692.47,4670 1792.94,4770.47 1792.94,4840.52 1821.96,4869.53 1892,4869.53 P6.11
STARTER: C8.2 P7.1 R19.1 U1.27 | length 2716.8
  Top Layer w20: C8.2 3855.47,4844.63 P7.1 3903.47,4856 R19.1@3903.47,4811.37
  Bottom Layer w20: U1.27@2192.47,4438 2192.47,4943 2217.47,4968 2220.43,4968 2221.96,4969.53 2262.99,4969.53 2292.94,4939.57 2292.94,4799.48 2379.43,4713 2935.47,4713 3142.47,4920 3701.43,4920 3734.96,4953.53 3805.94,4953.53 P7.1
TRIG1: P8.2 U1.63 | length 1156.3
  Bottom Layer w20: P8.2 2802.47,1389.96 2942,1529.48 2942,2318.26 2941.47,2318.78 2941.47,2359.04 2892.47,2408.04 U1.63@2892.47,2438
TRIG2: P9.2 U1.66 | length 1031.8
  Bottom Layer w20: P9.2 2734,1431.53 2734,1590.58 2792.47,1649.06 U1.66@2792.47,2338
TRIG3: P10.2 U1.43 | length 3831.9
  Top Layer w20: v1(2107.47,3513) 2391.47,3513 2540.8,3363.67 2540.8,2217.33 2459,2135.53 2459,1423.47 P10.2
  Bottom Layer w20: U1.43 1420.96,4439.3 1470.49,4389.77 1525.53,4389.77 1541.47,4373.83 1541.47,4079 v1(2107.47,3513)
TRIG4: P11.2 U1.42 | length 3651.8
  Top Layer w20: v1(2096.47,3382) 2368.47,3382 2441.3,3309.17 2441.3,2211.83 2285,2055.53 2285,1429.53 2354.53,1360 P11.2
  Bottom Layer w20: U1.42@1492.47,4338 1492.47,3995.53 2096.47,3391.53 v1(2096.47,3382)
TX: U1.13 U7.7 | length 5130
  Top Layer w20: U7.7 704.44,4229.96 753.97,4279.49 753.97,4320.52 724.96,4349.53 684.87,4349.53 538.47,4495.93 538.47,4837 744.47,5043 3052,5043 3569,4526 3569,4318 3510,4259 3067.3,4259 3042,4284.3 ; U1.13@2892.47,4438 2942.94,4387.53 2944.24,4388.83 3016.47,4388.83 3041.47,4363.83 3041.47,4284.83
V_SERVO+: P13.2 P14.2 U8.14 U8.16 | length 595.4
  Top Layer w25: P14.2 P13.2 P13.2@2030.47,1330.49 ; 1963.47,1319.49 1963.47,1597.49 1982.47,1616.49 2039.47,1616.49 2062.47,1593.49 U8.16
V_SERVO-: P13.1 P14.1 R16.2 R20.2 | length 340.5
  Top Layer w25: R20.2 1900.84,1218.86 P14.1 P13.1 2042.1,1218.86 R16.2
VIN: C1.P C4.P P5.1 R1.1 R8.1 U3.6 U5.6 | length 2372.1
  Top Layer w20: 3630.47,1692.1 3724.57,1692.1 4038.47,2006 4580.47,2006 4739.47,1847 4739.47,1600 ; 4587.57,1600 4739.47,1600 ; P5.1 4739.47,1600
  Top Layer w25: U5.6 3612.47,1771 3613.47,1772 3613.47,1709.1 3630.47,1692.1 ; U3.6 4503.84,1762 R1.1 4519.47,1636 C4.P@4579.29,1576.18 ; C4.P@4579.29,1542.04 4580.31,1541.02 4580.31,1575.16 C4.P@4579.29,1576.18 ; 4579.29,1608.29 C4.P@4579.29,1576.18
pads on no net: U1.1 U1.3 U1.4 U1.5 U1.6 U1.8 U1.9 U1.10 U1.12 U1.16 U1.23 U1.33 U1.36 U1.40 U1.41 U1.44 U1.45 U1.46 U1.47 U1.48 U1.49 U1.50 U1.51 U1.53 U1.55 U1.56 U1.57 U1.58 U1.59 U1.60 U1.62 U1.65 U1.67 U1.68 U1.69 U1.70 U1.71 U1.72 U1.73 U1.74 U1.77 U1.78 U1.79 U1.80 U1.82 U1.89 U1.91 U1.92 U1.93 U1.94 U1.97 U1.98 U1.99 U1.100 U4.0 U4.8 U4.9 U4.10 U4.11 U4.12 U6.3 U6.4 U6.5 U6.6 U6.7 U6.8 U6.9 U6.10 U6.11 U6.12 U6.14 U6.15 U6.16 U6.17 U6.18 U6.23 U6.24 U7.3 U7.4 U7.5 U7.6 U7.9 U7.10 U7.12 U8.5 U8.6 U8.11 U8.12
copper on no net: | length 36604
  Top Layer w10: 0,911 4918,911 4918,5144 0,5144 0,911
  Bottom Layer w10: 0,911 4918,911 4918,5144 0,5144 0,911

## Polygon pours and split planes (outlines as drawn)
GND on Top Layer "Mechanical 13-No Net" (solid, remove dead copper, pour order 1000): 4918,5144 4918,911 0,911 0,5144
GND on Bottom Layer "Mechanical 13-No Net" (solid, pour order 1001): 4918,5144 4918,911 0,911 0,5144

## Keep-outs
Keep-Out Layer:
  lines w10: 0,911 0,5144 4918,5144 4918,911 0,911

## Other copper
Top Layer:
  text "START" at 3719,5031 h39.37
  text "motor" at 1488,1694 h39.37
  text "+" at 4800,1684 h60
  text "enable" at 1460,1630 h39.37
  text "TOP" at 71,1615 h39.37
  text "-" at 2873,1532 h60
  text "-" at 1109,1519 h39.37
  text "-" at 1466,1504 h39.37
  text "S" at 2125,1445 h39.37 r270
  text "E" at 2869,1433 h60
  text "+" at 1594,1372 h39.37
  text "-" at 4787,1369 h60
  text "T" at 2874,1329 h60
  text "+" at 2152,1311 h19.68 r270
  text "-" at 2140,1225 h39.37 r270
  text "5V" at 2875,1221 h60
  text "+" at 1084,1217 h39.37
  text "UH4" at 2362,1195 h39.37 r270
  text "UH3" at 2500,1195 h39.37 r270
  text "UH2" at 2646,1192 h39.37 r270
  text "UH1" at 2786,1192 h39.37 r270
  text "G" at 1585,1137 h39.37
  text "ENC_B" at 1093,1080 h39.37
  text "ROBONAUT" at 453,1046 h39.37
  text "ENC_A" at 1091,1003 h39.37
  text "DIVISION BY ZERO" at 380,957 h39.37
  text "servo" at 1878,942 h39.37
Bottom Layer:
  text "Bottom" at 296,1412 h39.37

## Silkscreen, mask and mechanical layers (free items; w line width, h text height)
Top Solder:
  lines w10: 0,911 0,5144 4918,5144 4918,911 0,911

## Text inside footprints (layer, text, board x,y; h text height)
P6: Top Overlay "2" at 2542.47,4840 h50 r180; Top Overlay "1" at 2542.47,4940 h50 r180; Top Overlay "15" at 1682.47,4940 h50 r180; Top Overlay "16" at 1682.47,4840 h50 r180